# Altium PCB buzzer.PcbDoc
Units mm, origin at the board's own origin, x right, y up, seen from the top; angles counter-clockwise.
Board outline 50 x 50 mm, 2 copper layers (Top Layer, Bottom Layer); 21 components, 17 nets, 90 pads, 2 vias.
Unrouted connection lines stored in the file: 2.
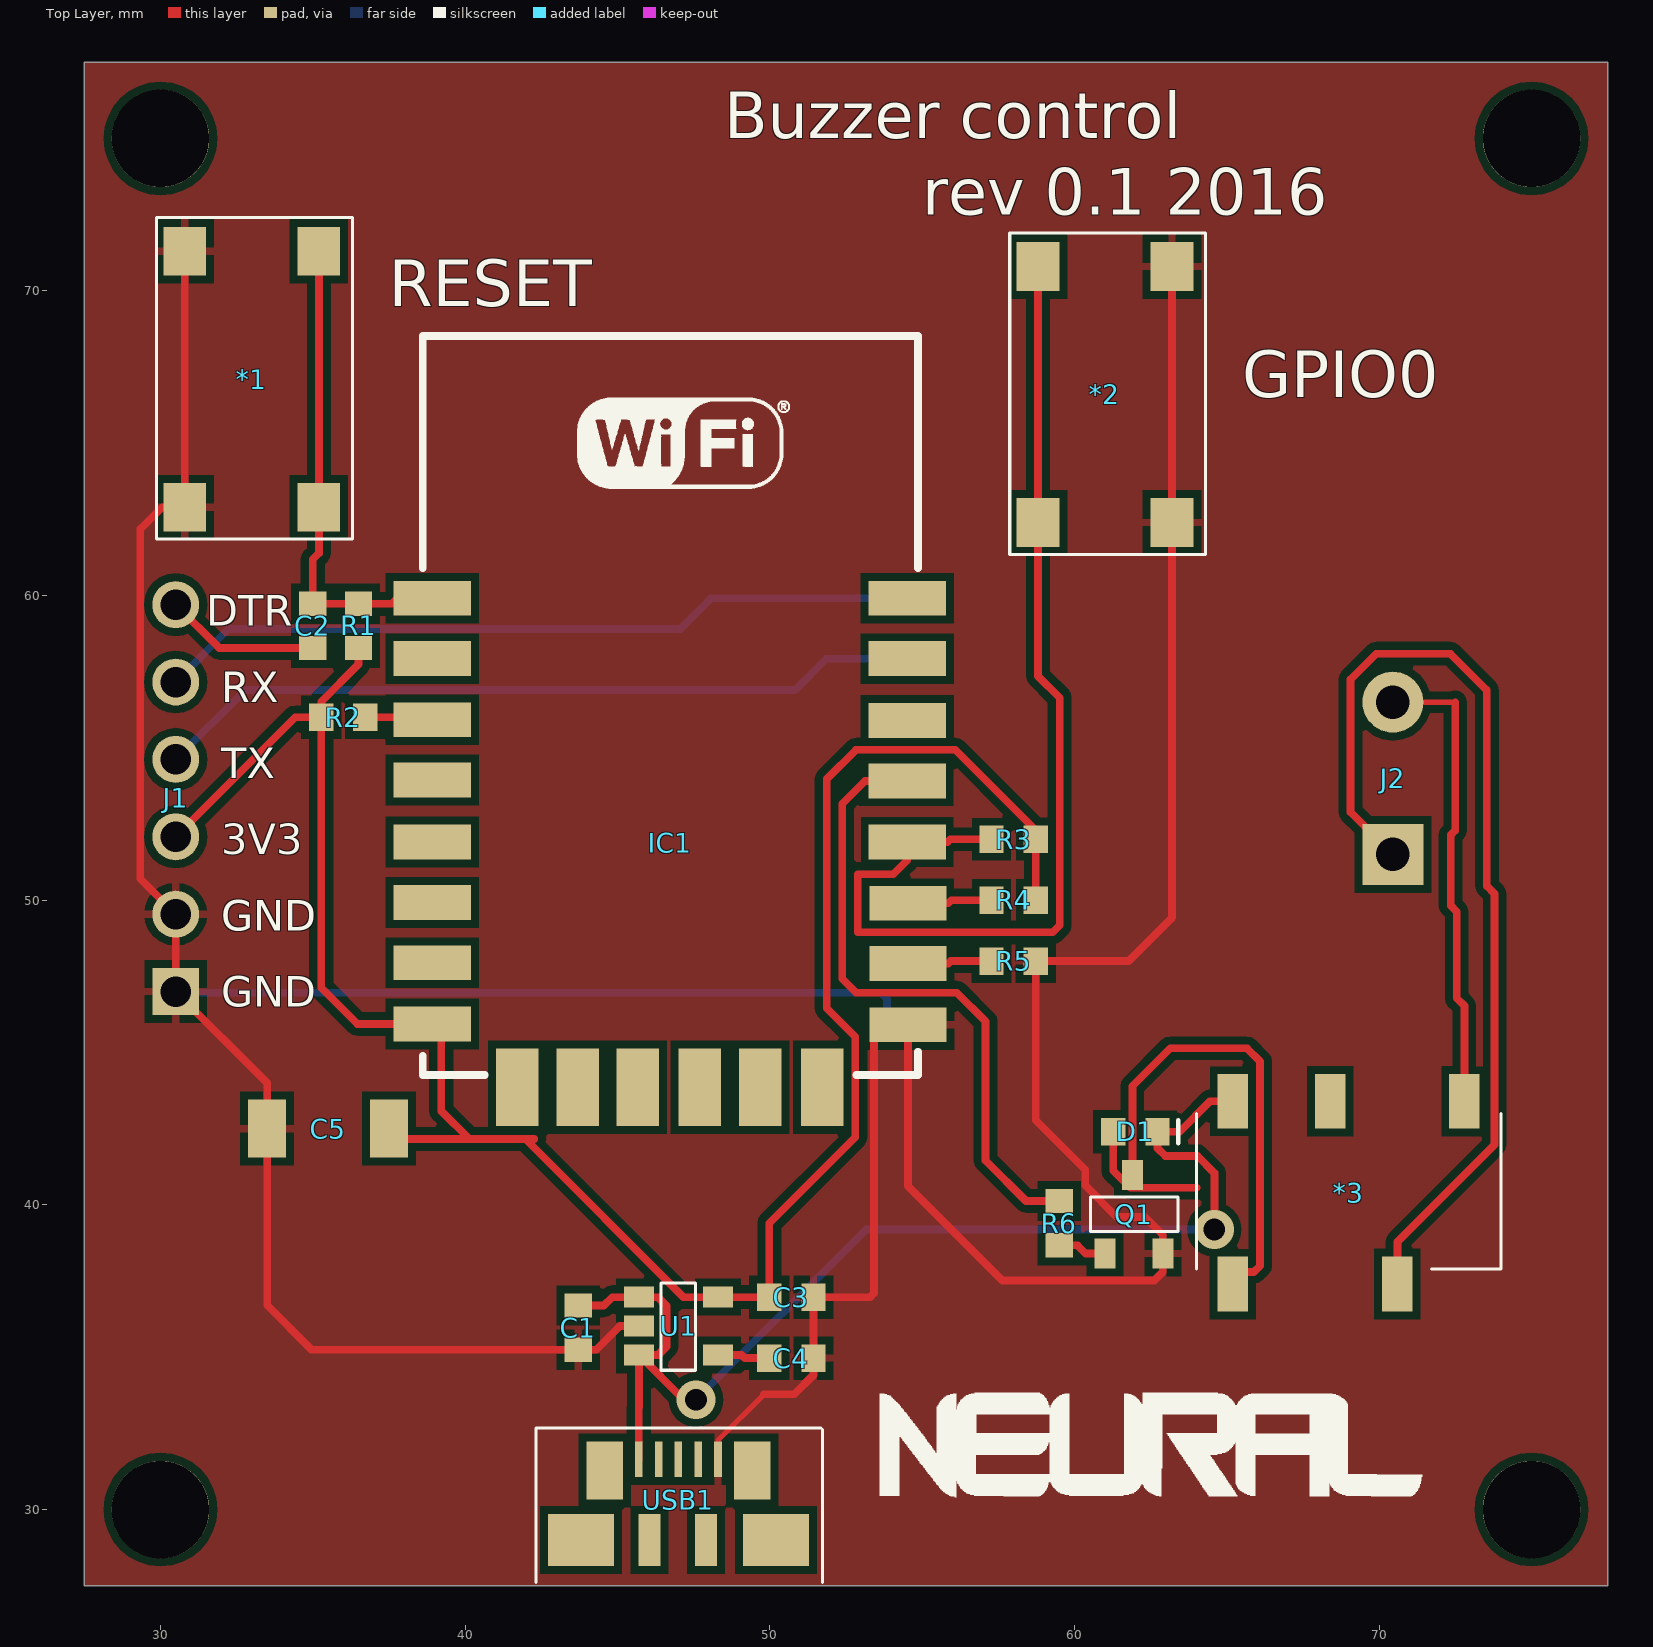
[diagram p0: Top Layer view]
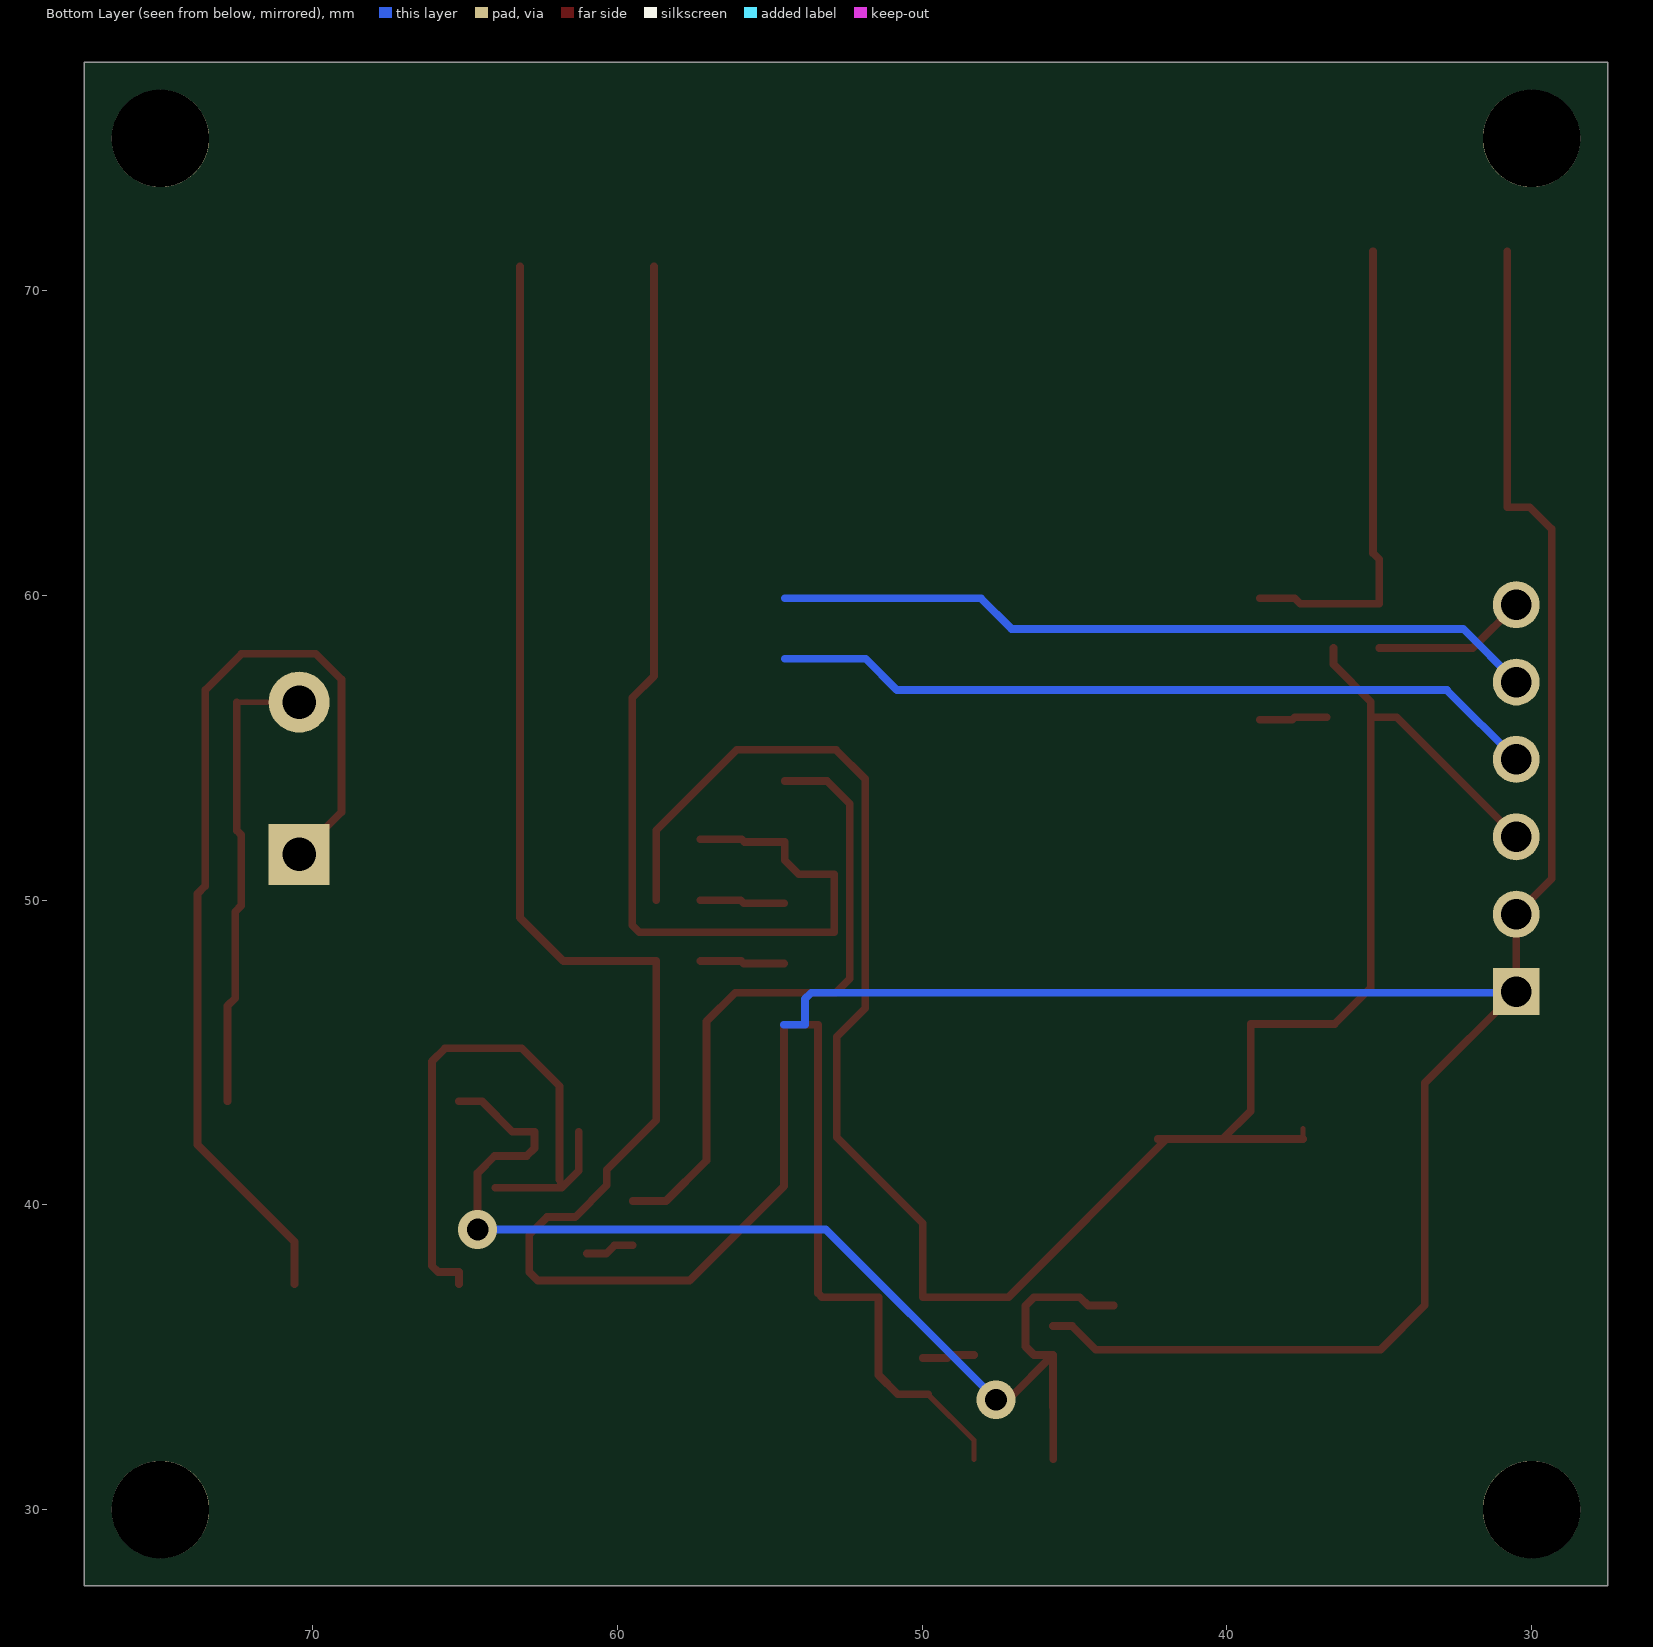
[diagram p1: Bottom Layer view, seen from below]
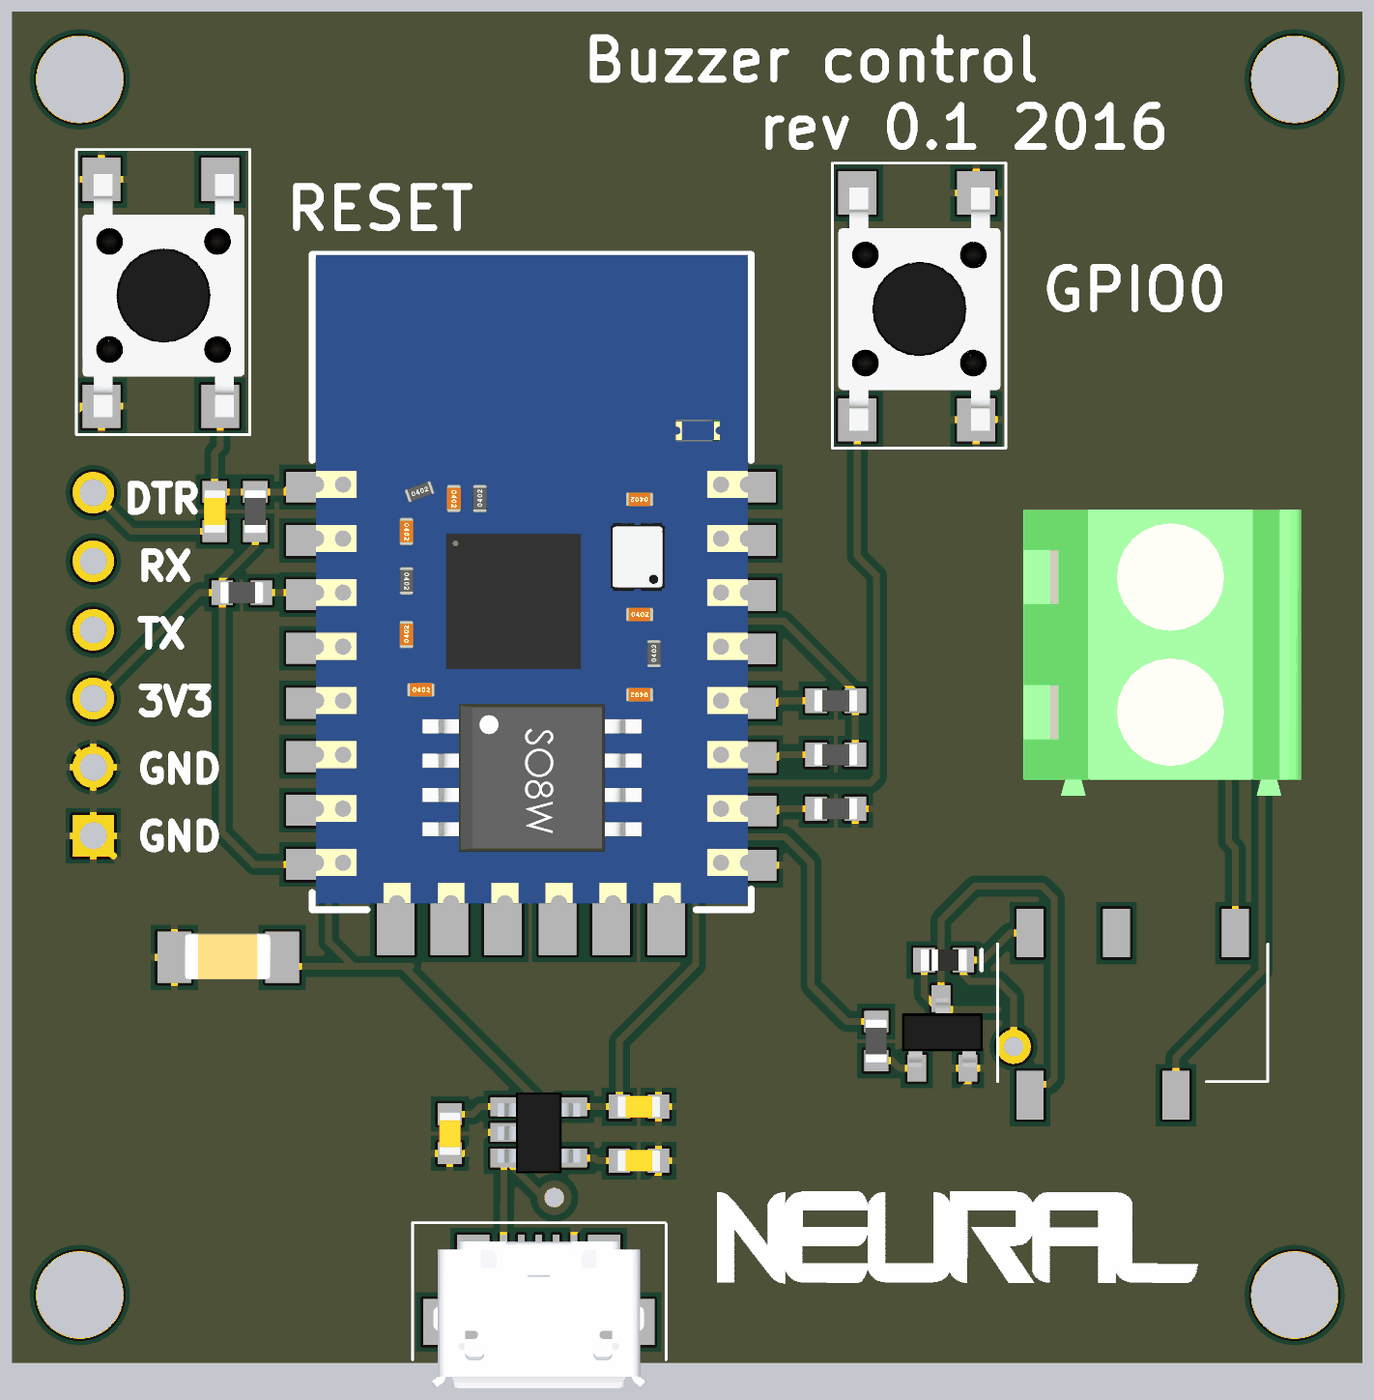
[diagram p2: 3D render of the assembled board from above, using the file's embedded part models]

## Layer stack, top to bottom
Top Solder: solder mask 0.0102, Solder Resist, Dk 3.5
Top Layer: signal copper 0.0356
Dielectric 1: dielectric 0.32, FR-4, Dk 4.8
Bottom Layer: signal copper 0.0356
Bottom Solder: solder mask 0.0102, Solder Resist, Dk 3.5

## Board outline
27.5,27.5 77.5,27.5 77.5,77.5 27.5,77.5

## Design rules (kind name [scope] priority, off if disabled: settings)
Clearance [All] p1: gap=0.254
PolygonConnect [All] p1: connectstyle=Relief reliefconductorwidth=0.254 reliefentries=4 polygonreliefangle="90 Angle" airgapwidth=0.254
RoutingVias [All] p1: holewidth=0.711 width=1.27 viastyle="Through Hole" minholewidth=0.711 minwidth=1.27 maxholewidth=0.711 maxwidth=1.27
SMDNeckDown [All] p1: percent=70.000
SolderMaskExpansion [All] p1: expansion=0.102
Width [All] p1: maxlimit=0.254 minlimit=0.125 preferedwidth=0.254
30 further rules are at their usual default settings.

## Components (designator, comment, footprint, x,y, rotation, side; value= is the part's Value field where it differs from the comment)
*1 "Push button" "TACTILE SWITCH" 36,64 r90 top
*2 "Push button" "TACTILE SWITCH" 64,63.5 r90 top
*3 "Relay" "RELAY IMC03GR SMD" 64,37.4 r0 top
C1 "100nF" CAP-0603-GEN 43.709,35.97 r90 top
C2 "100nF" CAP-0603-GEN 35,59 r270 top
C3 "22uF" CAP-0603-GEN 50.709,36.97 r180 top
C4 "10nF" CAP-0603-GEN 50.709,34.97 r180 top
C5 "100uF" CAP-1206-GEN 35.5,42.5 r0 top
D1 "Diode" "DIODE 0603" 62,42.4 r0 top
IC1 "ESP8266 ESP-12-E" "ESP8266 ESP-12-E" 55.5,43.5 r0 top
J1 "Connector 1x6" "PINHEADER 1x6 2.54" 30.5,47 r90 top
J2 "Connector 1x2" "Screw terminal 5mm" 70.45,51.5 r90 top
Q1 "" SOT23-3 61,38.4 r0 top
R1 "10K" "RESISTOR 0603" 36.5,59 r270 top
R2 "10K" "RESISTOR 0603" 36,56 r0 top
R3 "10K" "RESISTOR 0603" 58,52 r0 top
R4 "10K" "RESISTOR 0603" 58,50 r0 top
R5 "10K" "RESISTOR 0603" 58,48 r0 top
R6 "1K" "RESISTOR 0603" 59.5,39.4 r270 top
U1 "5V" SOT23-5 45.709,36.97 r270 top
USB1 "USB connector" "USB MICRO-B MOLEX SMD" 47,29 r0 top

## Footprints (in the part's own frame and the unit in brackets; to place one, negate y for a bottom-side part, rotate by r counter-clockwise, add the part's x,y. Pads: shape width x height; smd on the part's side, far side on the other; paste and mask are expansions set on the pad)
CAP-0603-GEN [mm] "Non-polarized 0603 (1608) chip capacitor"
  rect 0.8x0.9 smd: 1(-0.725,0) 2(0.725,0)
  body extent -0.8,-0.4 0.8,0.4, height 0.86
CAP-1206-GEN [mm] "Non-polarized 1206 (3216) chip capacitor"
  rect 1.25x1.9 smd: 1(-2,0) 2(2,0)
  body extent -1.63,-0.82 1.57,0.87, height 1.65
"DIODE 0603" [mm] "0603 (1608) Diode"
  rect 0.8x0.9 smd: 1(-0.725,0) 2(0.725,0)
  silkscreen extent 1.4,-0.37 1.4,0.38, body extent -0.85,-0.4 0.85,0.4, height 0.56
"ESP8266 ESP-12-E" [mil] "ESP8266 ESP-12-E"
  rect 100x45 smd: 1(-653,646) 2(-653,568) 3(-653,489) 4(-653,411) 5(-653,331) 6(-653,253) 7(-653,175) 8(-653,96) 15(-38,95) 16(-38,174) 17(-38,252) 18(-39,331) 19(-39,410) 20(-39,488) 21(-39,568) 22(-39,646)
  rect 55x100 smd: 9(-543,14) 10(-465,14) 11(-387,14) 12(-307,14) 13(-229,14) 14(-149,14)
  silkscreen extent -665,30 -25,985, body extent -659,39 -30,984
"PINHEADER 1x6 2.54" [mm] "Single row 6 pin header"
  rect 1.54x1.54 hole 1: 1(0,0)
  round 1.54 hole 1: 2(2.54,0) 3(5.08,0) 4(7.62,0) 5(10.16,0) 6(12.7,0)
"RELAY IMC03GR SMD" [mm] "TE CONNECTIVITY  IMC03GR  Signal Relay"
  rect 1x1.8 smd: 1(1.2,0) 3(6.6,0) 5(8.8,6) 7(4.4,6) 8(1.2,6)
  silkscreen extent 0,0.5 10,5.6, body extent 0,0.5 10,5.6, height 5
"RESISTOR 0603" [mm] "Chip resistor 0603 (1608)"
  rect 0.8x0.9 smd: 1(-0.725,0) 2(0.725,0)
  body extent -0.8,-0.4 0.8,0.4, height 0.5
"Screw terminal 5mm" [mm]
  rect 2x2 hole 1.1: 1(0,0)
  round 2 hole 1.1: 2(5,0)
  body extent -3.02,-4.8 7.58,5.5, height 14.2
SOT23-3 [mm] "SOT23-3"
  rect 0.69x0.99 smd: 1(0,0) 2(1.9,0) 3(0.9,2.575)
  silkscreen extent -0.47,0.72 2.4,1.85, body extent -0.55,0.05 2.45,2.59, height 1.1
SOT23-5 [mm] "SOT23-5"
  rect 0.69x0.99 smd: 1(0,0) 2(0.95,0) 3(1.9,0) 4(1.9,2.59) 5(0,2.59)
  silkscreen extent -0.47,0.73 2.4,1.85, body extent -0.53,-0.24 2.47,2.82, height 1.45
"TACTILE SWITCH" [mm] "MULTICOMP  MC32882"
  rect 1.6x1.4 smd: 1(-1.1,5.2) 1(7.3,5.2) 2(-1.1,0.8) 2(7.3,0.8)
  silkscreen extent -2.15,-0.3 8.4,6.12, body extent -1.5,-0.1 7.5,5.9, height 4.3
"USB MICRO-B MOLEX SMD" [mm] "MOLEX 47346-0001"
  rect 0.25x1.18 smd: 1(-1.3,2.65) 2(-0.65,2.65) 3(0,2.65) 4(0.65,2.65) 5(1.3,2.65)
  rect 2.175x1.7 smd: SH(-3.2,0) SH(3.2,0)
  rect 1.2x1.9 smd: SH(-2.425,2.275) SH(2.425,2.275)
  rect 0.725x1.7 smd: SH(-0.95,0) SH(0.9,0)
  silkscreen extent -4.68,-1.4 4.73,3.68, body extent -3.99,-2.45 3.99,2.98, height 2.67

## Part data
C1 C2 C3 C4 C5: library part Capacitor, "Capacitor"
J1: "Single row six pin header"
J2: "Single row two pin header"
Q1: library part "Transistor NPN", "Transistor NPN"
R1 R2 R3 R4 R5 R6: library part Resistor, "Resistor"
U1: library part SPX3819
USB1: "USB Connector"

## Free pads (board coordinates)
  round 3.2 hole 3.2: ""(30,30) ""(30,75) ""(75,30) ""(75,75)

## Via types
v1: diameter 1.27, hole 0.711, Top Layer to Bottom Layer, tented both sides, 1 vias
v2: diameter 1.27, hole 0.711, Top Layer to Bottom Layer, 1 vias

## Nets (pads, with @x,y where several pads share a name; then routed paths per layer and width w, separated by ;. In a path a pad name is that pad's centre, name@x,y a point inside that pad or via, vN(x,y) a via of type N, cw(c..) or ccw(c..) an arc to the next point about the centre after c; other vN are vias at no path point)
3V3: C3.2 C5.2 IC1.8 J1.3 R1.2 R2.1 R3.2 R4.2 U1.5 | length 73.8
  Top Layer w0.178: C5.2@37.5,42.164 C5.2
  Top Layer w0.254: J1.3 34.42,56 R2.1 ; R1.2 36.5,57.74 35.275,56.515 R2.1 ; 41.974,42.164 47.168,36.97 U1.5 C3.2 49.985,39.393 52.807,42.215 52.807,45.517 51.868,46.456 51.868,53.976 52.832,54.94 56.083,54.94 58.725,52.298 R3.2 R4.2 ; 42.266,42.164 37.5,42.164 40.132,42.164 39.218,43.078 39.218,45.938 IC1.8 36.459,45.938 35.275,47.123 R2.1
5V: *3.8 C1.2 D1.2 U1.1 U1.3 USB1.1 | length 38.2
  Top Layer w0.254: C1.2 44.552,36.695 44.827,36.97 U1.1 46.33,36.97 46.609,36.691 46.609,35.349 46.33,35.07 U1.3 ; USB1.1 45.7,33.35 45.709,33.36 U1.3 ; v1(47.574,33.604) 47.175,33.604 U1.3 ; v2(64.592,39.192) 64.592,41.046 64.033,41.605 62.979,41.605 62.725,41.859 D1.2 63.449,42.4 64.449,43.4 *3.8
  Bottom Layer w0.254: v1(47.574,33.604) 53.162,39.192 v2(64.592,39.192)
BUZZER_GND: *3.3 J2.1 | length 32.6
  Top Layer w0.254: J2.1 69.063,52.887 69.063,57.252 69.901,58.09 72.339,58.09 73.533,56.896 73.533,50.467 73.787,50.213 73.787,41.973 70.6,38.786 *3.3
BUZZER_SIGNAL: *3.5 J2.2 | length 15.4
  Top Layer w0.178: J2.2 72.5,56.5
  Top Layer w0.254: 72.5,56.5 72.5,52.289 72.35,52.139 72.35,49.823 72.55,49.623 72.55,46.779 72.8,46.529 *3.5
DTR: C2.2 J1.6 | length 5.1
  Top Layer w0.254: J1.6 31.925,58.275 C2.2
GND: *1.1 *2.2 C1.1 C3.1 C4.1 C5.1 IC1.15 J1.1 J1.2 Q1.2 R5.2 U1.2 USB1.5 | length 148.6
  Top Layer w0.175: USB1.5 48.3,32.273 49.809,33.781
  Top Layer w0.254: *1.1@30.8,71.3 30.8,62.9 30.058,62.9 29.337,62.179 29.337,50.703 J1.2 J1.1 33.5,44 C5.1 33.5,36.703 34.958,35.245 C1.1 44.298,35.245 45.073,36.02 U1.2 ; 49.809,33.781 50.8,33.781 51.434,34.416 C4.1 C3.1 53.289,36.97 53.416,37.097 53.416,45.913 IC1.15 54.534,40.615 57.633,37.516 62.62,37.516 62.9,37.795 Q1.2 62.9,39.014 62.316,39.599 61.392,39.599 60.35,40.64 60.35,41.148 58.725,42.773 R5.2 61.773,48 63.2,49.427 63.2,62.4 *2.2@63.2,70.8
  Bottom Layer w0.254: J1.1 30.54,46.96 53.645,46.96 53.848,46.757 53.848,45.913 54.535,45.913
GPIO0: *2.1 IC1.18 R3.1 | length 35.8
  Top Layer w0.254: R3.1 55.922,52 55.829,51.907 IC1.18 54.509,51.312 54.051,50.853 52.884,50.853 52.884,48.946 59.284,48.946 59.512,49.174 59.512,56.642 58.8,57.354 58.8,62.4 *2.1@58.8,70.8
Net*1_2: *1.2 C2.1 IC1.1 R1.1 | length 15.6
  Top Layer w0.254: *1.2@35.2,71.3 35.2,62.9 35.2,61.389 35,61.189 C2.1 R1.1 37.592,59.725 37.775,59.908 IC1.1
NetC4_2: C4.2 U1.4 | length 1.7
  Top Layer w0.254: U1.4 49.073,35.07 49.173,34.97 C4.2
NetIC1_3: IC1.3 R2.2 | length 2.2
  Top Layer w0.254: R2.2 37.77,56 37.849,55.921 IC1.3
NetIC1_16: IC1.16 R5.1 | length 2.8
  Top Layer w0.254: IC1.16 55.855,47.92 55.935,48 R5.1
NetIC1_17: IC1.17 R4.1 | length 2.8
  Top Layer w0.254: IC1.17 55.855,49.901 55.954,50 R4.1
NetQ1_1: Q1.1 R6.2 | length 1.6
  Top Layer w0.254: R6.2 60.096,38.675 60.371,38.4 Q1.1
RELAY: *3.1 D1.1 Q1.3 | length 20.5
  Top Layer w0.178: Q1.3@61.9,40.564 Q1.3@61.9,40.825
  Top Layer w0.254: D1.1 61.275,41.123 61.834,40.564 61.9,40.564 64.008,40.564 ; Q1.3@61.9,40.825 Q1.3 61.9,43.891 63.145,45.136 65.659,45.136 66.091,44.704 66.091,37.998 65.888,37.795 65.2,37.795 *3.1
RELAY_SIGNAL: IC1.19 R6.1 | length 21
  Top Layer w0.254: IC1.19 53.127,53.914 52.376,53.163 52.376,47.421 52.832,46.965 56.134,46.965 57.081,46.018 57.081,41.453 58.409,40.125 R6.1
RX: IC1.22 J1.5 | length 25.1
  Bottom Layer w0.254: J1.5 32.243,58.903 47.066,58.903 48.072,59.908 54.509,59.908
TX: IC1.21 J1.4 | length 25.4
  Bottom Layer w0.254: J1.4 32.776,56.896 50.825,56.896 51.857,57.927 54.509,57.927
pads on no net: *3.7 IC1.2 IC1.4 IC1.5 IC1.6 IC1.7 IC1.9 IC1.10 IC1.11 IC1.12 IC1.13 IC1.14 IC1.20 USB1.2 USB1.3 USB1.4 USB1.SH

## Polygon pours and split planes (outlines as drawn)
GND on Top Layer "GND" (solid, pour order 4): 27.5,27.5 77.5,27.5 77.5,77.5 27.5,77.5 27.5,27.5

## Silkscreen, mask and mechanical layers (free items; w line width, h text height)
Top Overlay:
  drawing of 867 lines, arcs and shapes, not listed
  text "Buzzer control" at 48.5,75 h1.52
  text "rev 0.1 2016" at 55,72.5 h1.52
  text "RESET" at 37.5,69.5 h1.52
  text "GPIO0" at 65.5,66.5 h1.52
  text "DTR" at 31.5,59 h1
  text "RX" at 32,56.5 h1
  text "TX" at 32,54 h1
  text "3V3" at 32,51.5 h1
  text "GND" at 32,49 h1
  text "GND" at 32,49 h1
  text "GND" at 32,46.5 h1
Mechanical 1:
  the board outline again, w0.1

## Text inside footprints (layer, text, board x,y; h text height)
IC1: Mechanical 13 "CUTOUT POLYGON" at 38.915,67.391 h0.25; Mechanical 13 "ANTENNA AREA" at 38.915,67.899 h0.25